# Altium PCB PCB1.PcbDoc
Units mil, origin at the board's own origin, x right, y up, seen from the top; angles counter-clockwise.
Board outline 2755.91 x 1968.5 mil, 2 copper layers (Top Layer, Bottom Layer); 43 components, 48 nets, 152 pads, 15 vias.
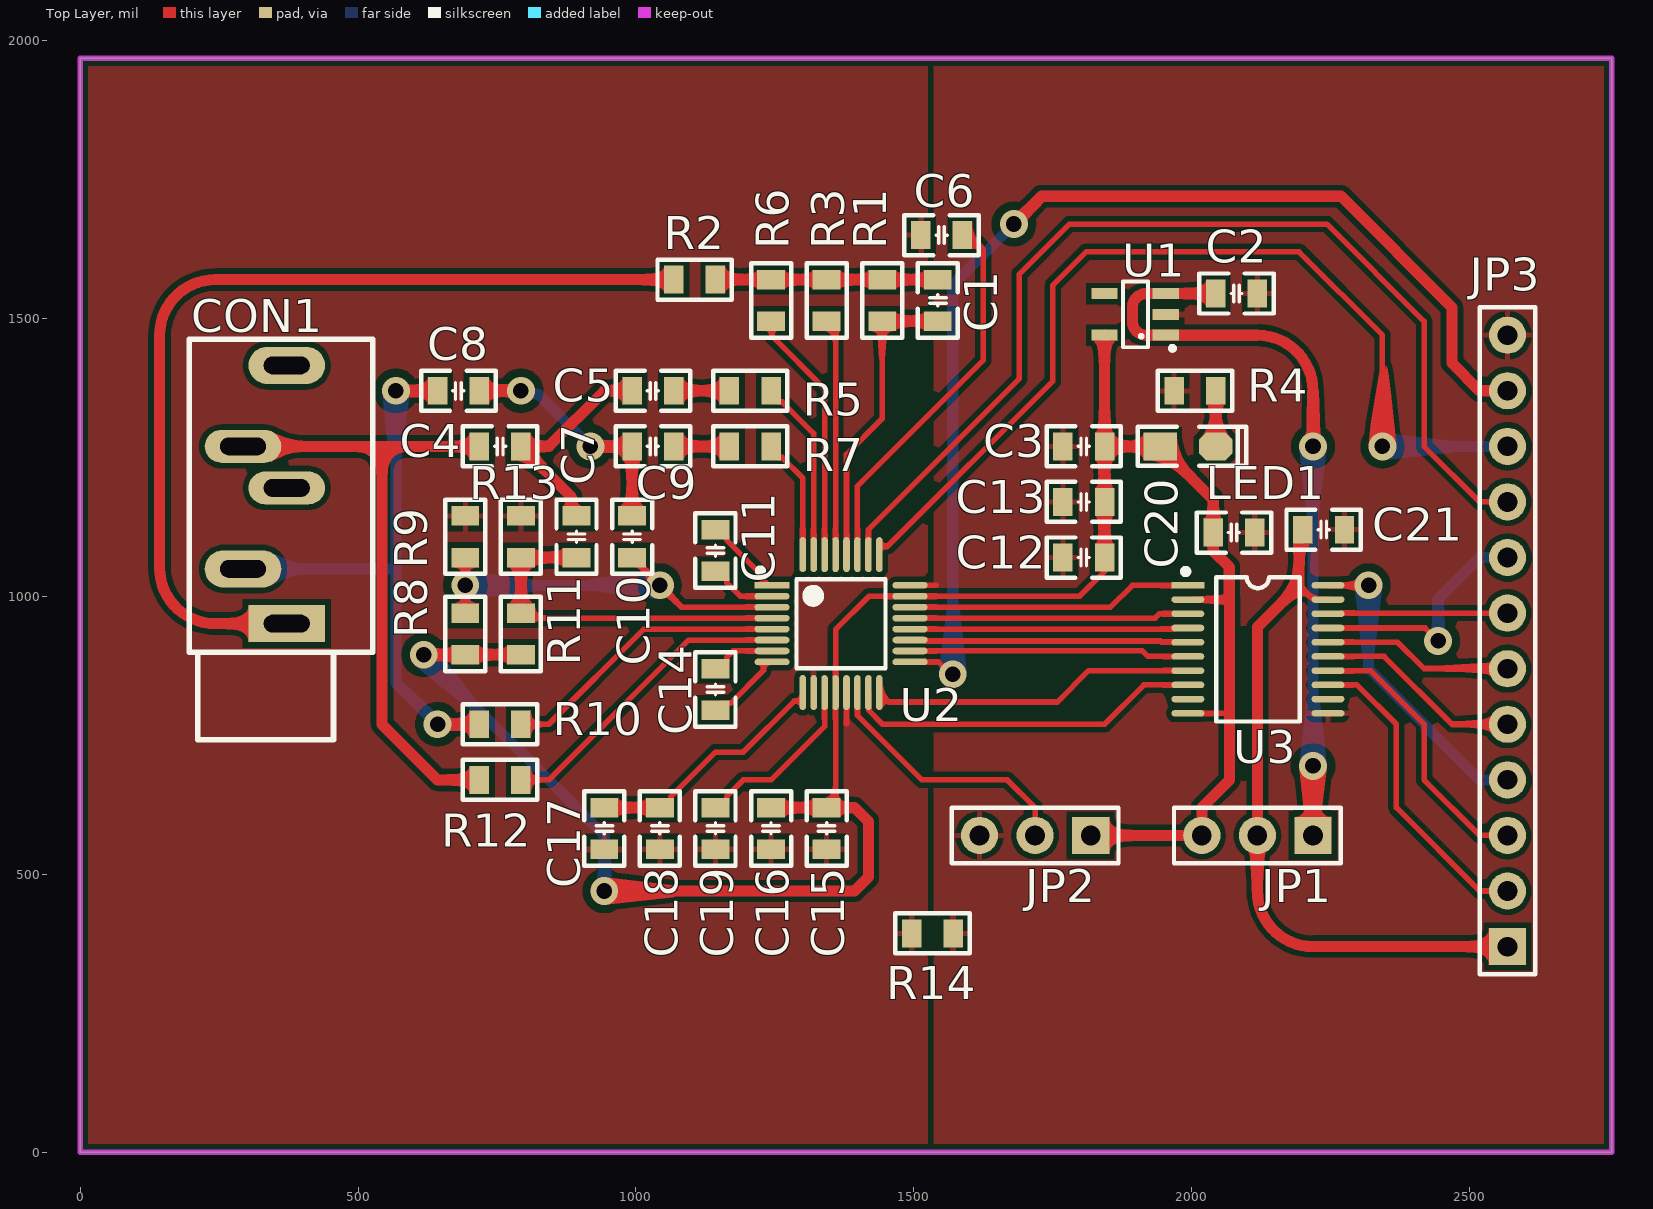
[diagram p0: Top Layer view]
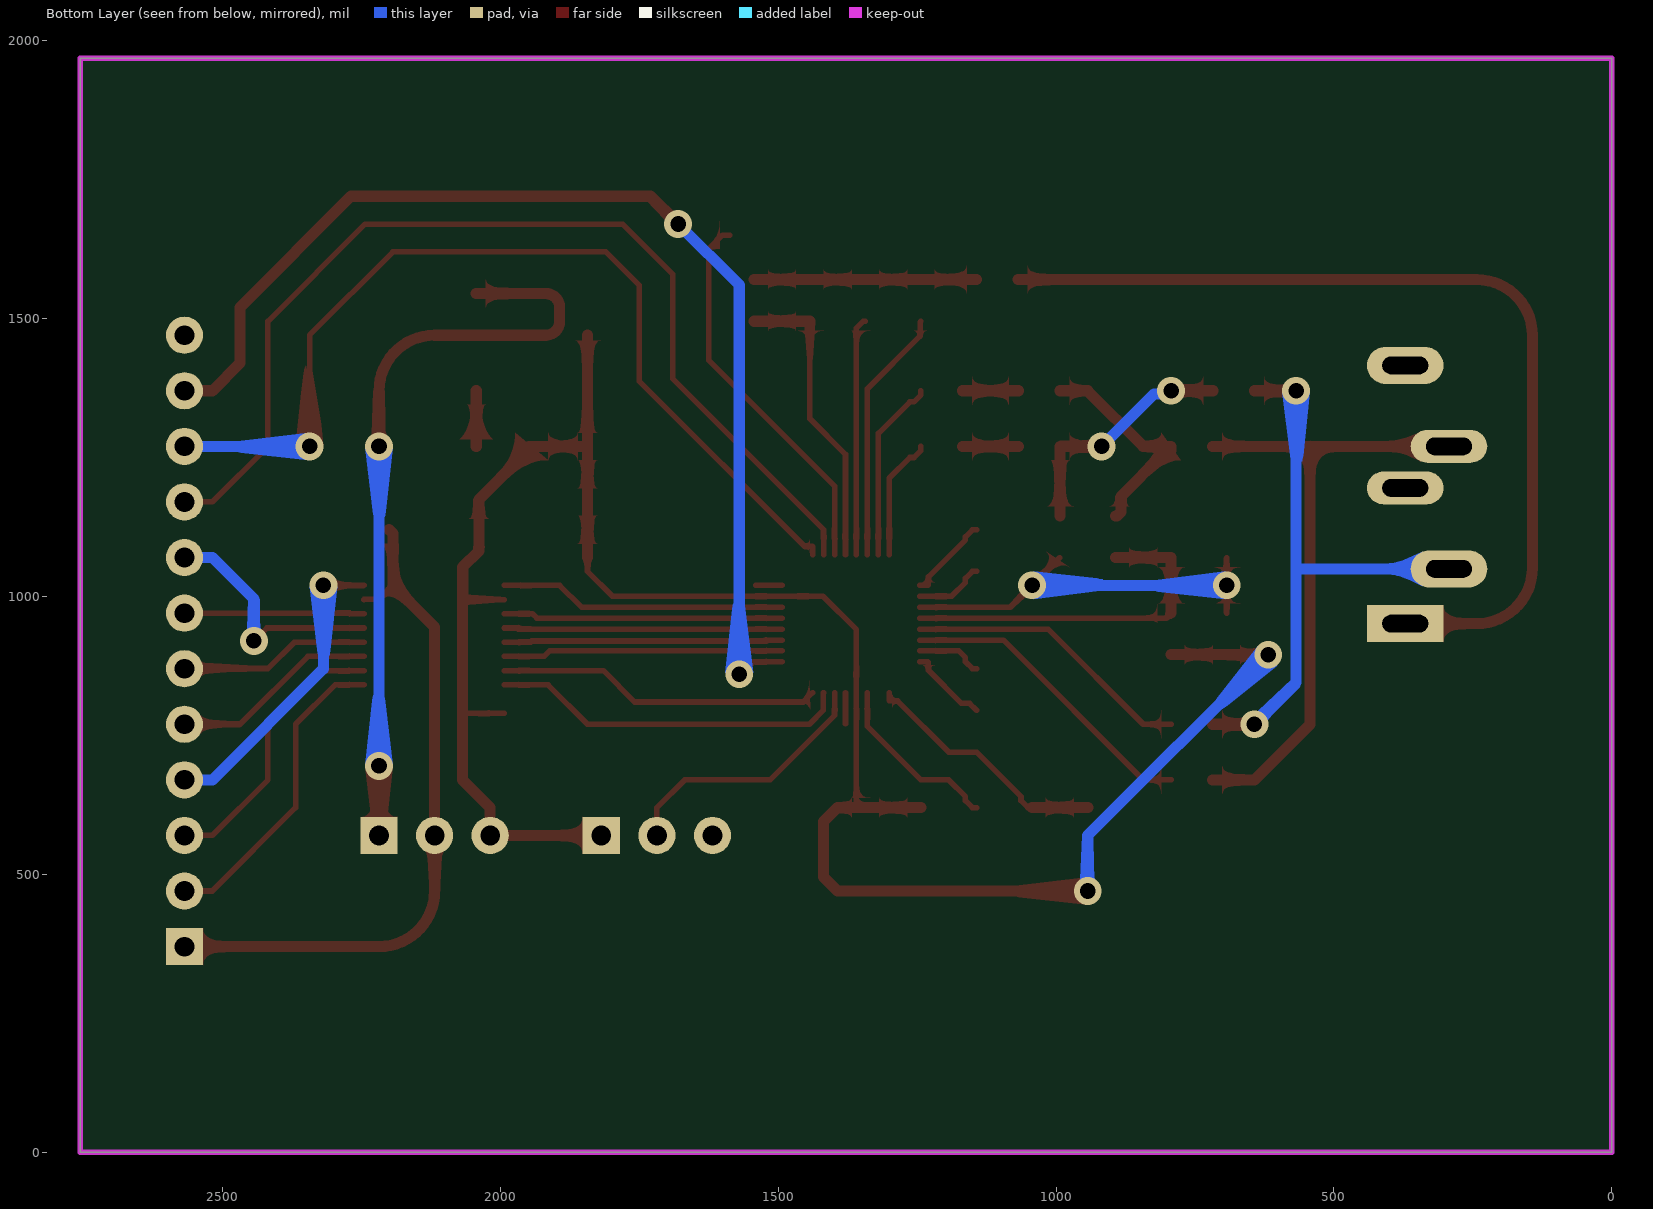
[diagram p1: Bottom Layer view, seen from below]

## Layer stack, top to bottom
Top Solder: solder mask 0.4, Solder Resist, Dk 3.5
Top Layer: signal copper 1.4
Dielectric 1: dielectric 12.6, FR-4, Dk 4.8
Bottom Layer: signal copper 1.4
Bottom Solder: solder mask 0.4, Solder Resist, Dk 3.5

## Board outline
0,0 0,1968.5 2755.91,1968.5 2755.91,0

## Design rules (kind name [scope] priority, off if disabled: settings)
Clearance [All] p1: gap=10 ignorepadtopadclearanceinfootprint=TRUE except(0: Arc-Hole Track-Hole SMDPad-Hole THPad-Hole Via-Hole Fill-Hole Poly-Hole Region-Hole Text-Hole; 4: SMDPad-Region; 7: Arc-Arc Arc-Track Arc-SMDPad Track-Track Track-SMDPad Track-Region Region-Region; 15: Via-Fill Via-Poly Via-Region)
PolygonConnect [All] p1: connectstyle=Relief reliefconductorwidth=10 reliefentries=4 polygonreliefangle="90 Angle" airgapwidth=10
RoutingVias [All] p1: holewidth=28 width=50 viastyle="Through Hole" minholewidth=28 minwidth=50 maxholewidth=28 maxwidth=50
SolderMaskExpansion [All] p1: expansion=4
Width [All] p1: maxlimit=20 minlimit=10 preferedwidth=10 minimp=50.000000 maximp=50.000000 favimp=50.000000
30 further rules are at their usual default settings.

## Components (designator, comment, footprint, x,y, rotation, side; value= is the part's Value field where it differs from the comment)
C1 "47p" "C 0805_L" 1543.11,1532.56 r270 top
C2 "1u" "C 0805_L" 2080.51,1544.96 r180 top
C3 "1u" "C 0805_L" 1805.71,1269.96 r0 top
C4 "100n" "C 0805_L" 755.71,1269.96 r0 top
C5 "2.2n" "C 0805_L" 1030.52,1369.96 r0 top
C6 "1u" "C 0805_L" 1550,1650 r180 top
C7 "2.2n" "C 0805_L" 893.11,1107.37 r90 top
C8 "100n" "C 0805_L" 680.51,1369.96 r0 top
C9 "2.2n" "C 0805_L" 1030.52,1269.96 r0 top
C10 "2.2n" "C 0805_L" 993.11,1107.37 r90 top
C11 "47n" "C 0805_L" 1143.11,1082.37 r90 top
C12 "100n" "C 0805_L" 1805.71,1069.96 r0 top
C13 "1u" "C 0805_L" 1805.71,1169.96 r180 top
C14 "47n" "C 0805_L" 1143.11,832.56 r90 top
C15 "1u" "C 0805_L" 1343.11,582.56 r90 top
C16 "100n" "C 0805_L" 1243.11,582.56 r90 top
C17 "10u" "C 0805_L" 943.11,582.56 r90 top
C18 "100n" "C 0805_L" 1043.11,582.56 r90 top
C19 "1u" "C 0805_L" 1143.11,582.56 r90 top
C20 "100n" "C 0805_L" 2075.9,1114.96 r180 top
C21 "100n" "C 0805_L" 2237.4,1120 r0 top
CON1 "PJ325_BK" PJ325_BK 371.85,951.06 r90 top
JP1 "HDR-1X3" HDR2.54-LI-3P 2118.11,569.96 r180 top
JP2 "HDR-1X3" HDR2.54-LI-3P 1718.11,569.96 r180 top
JP3 "HDR-1X12" HDR2.54-LI-12P 2568.11,919.96 r90 top
LED1 "绿色" "LED 0805G" 1993.11,1269.96 r0 top
R1 "1M" "R 0805_L" 1443.11,1532.56 r270 top
R2 "100k" "R 0805_L" 1105.71,1569.96 r0 top
R3 "100k" "R 0805_L" 1343.11,1532.56 r270 top
R4 "330R" "R 0805_L" 2005.71,1369.96 r0 top
R5 "40.2k" "R 0805_L" 1205.71,1369.96 r0 top
R6 "0R" "R 0805_L" 1243.11,1532.56 r270 top
R7 "40.2k" "R 0805_L" 1205.71,1269.96 r0 top
R8 "10M" "R 0805_L" 693.11,932.56 r270 top
R9 "10M" "R 0805_L" 693.11,1107.37 r90 top
R10 "0R" "R 0805_L" 755.71,769.96 r0 top
R11 "10M" "R 0805_L" 793.11,932.56 r270 top
R12 "0R" "R 0805_L" 755.71,669.96 r0 top
R13 "10M" "R 0805_L" 793.11,1107.37 r90 top
R14 "0R" "R 0805_L" 1533.47,393.7 r0 top
U1 "REG102NA-3.3" REG102NA-3.3 1898.23,1507.36 r180 top
U2 "ADS1292R" ADS1292R 1369,951.06 r0 top
U3 "TXS0108EPWR" TXS0108EPWR 2119.09,904.8 r0 top

## Footprints (in the part's own frame and the unit in brackets; to place one, negate y for a bottom-side part, rotate by r counter-clockwise, add the part's x,y. Pads: shape width x height; smd on the part's side, far side on the other; paste and mask are expansions set on the pad)
ADS1292R [mm]
  rect 1.6x0.3 smd: 1(-3.152,1.75)
  oval 1.6x0.3 smd: 2(-3.152,1.25) 3(-3.152,0.75) 4(-3.152,0.25) 5(-3.152,-0.25) 6(-3.152,-0.75) 7(-3.152,-1.25) 8(-3.152,-1.75) 17(3.152,-1.75) 18(3.152,-1.25) 19(3.152,-0.75) 20(3.152,-0.25) 21(3.152,0.25) 22(3.152,0.75) 23(3.152,1.25) 24(3.152,1.75)
  oval 0.3x1.6 smd: 9(-1.75,-3.152) 10(-1.25,-3.152) 11(-0.75,-3.152) 12(-0.25,-3.152) 13(0.25,-3.152) 14(0.75,-3.152) 15(1.25,-3.152) 16(1.75,-3.152) 25(1.75,3.152) 26(1.25,3.152) 27(0.75,3.152) 28(0.25,3.152) 29(-0.25,3.152) 30(-0.75,3.152) 31(-1.25,3.152) 32(-1.75,3.152)
  silkscreen extent -3.81,-2.03 2.03,2.54, body extent -3.5,-3.5 3.5,3.5, height 1.05
"C 0805_L" [mil] "无极性贴片电容"
  rect 35x50 smd: 1(-37.4,0) 2(37.4,0)
  silkscreen extent -67,-36 67,36, body extent -39,-24 39,24, height 20
HDR2.54-LI-3P [mm] "排针，3脚"
  rect 1.7x1.7 hole 0.9: 1(-2.54,0)
  round 1.7 hole 0.9: 2(0,0) 3(2.54,0)
  silkscreen extent -3.81,-1.27 3.81,1.27, body extent -3.81,-1.27 3.81,1.27, height 8.5
HDR2.54-LI-12P [mm] "排针，13脚"
  rect 1.7x1.7 hole 0.9: 1(-13.97,0)
  round 1.7 hole 0.9: 2(-11.43,0) 3(-8.89,0) 4(-6.35,0) 5(-3.81,0) 6(-1.27,0) 7(1.27,0) 8(3.81,0) 9(6.35,0) 10(8.89,0) 11(11.43,0) 12(13.97,0)
  silkscreen extent -15.24,-1.27 15.24,1.27, body extent -15.24,-1.27 15.24,1.27, height 8.5
"LED 0805G" [mil] "绿色0805LED"
  rect 60x50 smd: 1(-50,0)
  oct 60x50 smd: 2(50,0)
  silkscreen extent -90,-35 105,35, body extent -39,-25 39,25, height 32
PJ325_BK [mm] "黑色，18*8.1*12.3mm"
  rect 1.7x3.5 hole 0.8 slot 2.1 at 90 deg: 1(0,0)
  oval 1.5x3.5 hole 0.8 slot 2.1 at 90 deg: 2(6.2,0) 3(8.1,2)
  oval 1.7x3.5 hole 0.8 slot 2.1 at 90 deg: 4(11.8,0) 5(2.5,2)
  silkscreen extent -5.3,-3.94 13,4.46, body extent -5.23,-3.9 12.8,4.2, height 12.35
"R 0805_L" [mil] "1/8W贴片电阻"
  rect 35x50 smd: 1(-37.4,0) 2(37.4,0)
  silkscreen extent -67,-36 67,36, body extent -39,-25 39,25, height 20
REG102NA-3.3 [mm]
  rect 1.2x0.5 smd: 1(-1.4,0.95) 2(-1.4,0) 3(-1.4,-0.95) 4(1.4,-0.95) 5(1.4,0.95)
  silkscreen extent -1.78,-1.5 0.56,1.63, body extent -1.4,-1.5 1.4,1.5, height 1.15
TXS0108EPWR [mm]
  rect 1.5x0.3 smd: 1(-3.2,2.925)
  oval 1.5x0.3 smd: 2(-3.2,2.275) 3(-3.2,1.625) 4(-3.2,0.975) 5(-3.2,0.325) 6(-3.2,-0.325) 7(-3.2,-0.975) 8(-3.2,-1.625) 9(-3.2,-2.275) 10(-3.2,-2.925) 11(3.2,-2.925) 12(3.2,-2.275) 13(3.2,-1.625) 14(3.2,-0.975) 15(3.2,-0.325) 16(3.2,0.325) 17(3.2,0.975) 18(3.2,1.625) 19(3.2,2.275) 20(3.2,2.925)
  silkscreen extent -3.43,-3.3 1.91,3.69, body extent -3.2,-3.25 3.2,3.25, height 1.03

## Part data
C1 C2 C3 C4 C5 C6 C7 C8 C9 C10 C11 C12 C13 C14 C15 C16 C17 C18 C19 C20 C21: library part C, "无极性贴片电容"
CON1: library part PJ325, "3.5mm耳机插座", BOM名称=¶ú», 学习资源=www.ooocke.
JP1 JP2: library part "Header 3", "3P接插件", BOM名称=3P接, 学习资源=www.ooocke.
JP3: library part "Header 12", "12P接插件", BOM名称=12P接, 学习资源=www.ooocke.
LED1: library part LED-SMD, "贴片LED", BOM名称=贴片, 学习资源=www.ooocke.
R1 R2 R3 R4 R5 R6 R7 R8 R9 R10 R11 R12 R13 R14: library part R, "贴片电阻"

## Via types
v1: diameter 50, hole 28, Top Layer to Bottom Layer, 15 vias

## Nets (pads, with @x,y where several pads share a name; then routed paths per layer and width w, separated by ;. In a path a pad name is that pad's centre, name@x,y a point inside that pad or via, vN(x,y) a via of type N, cw(c..) or ccw(c..) an arc to the next point about the centre after c; other vN are vias at no path point)
+3V3: C3.2 C12.2 C13.1 C15.2 C16.2 C20.2 JP1.3 JP2.1 LED1.1 R8.2 R11.2 U1.5 U2.12 U2.23 U3.2 U3.10 | length 4011.4
  Top Layer w10: C15.2@1346.66,619.96 1359.16,632.46 U2.12 1359.16,940.15 1419.28,1000.28 U2.23 1798.43,1000.28 1843.11,1044.96 C12.2 ; U3.10 2062.8,789.65 2068.11,794.96 ; U3.2 2067.52,994.37 2068.11,994.96
  Top Layer w20: v1(618.11,894.96) 618.31,895.16 R8.2 R11.2 ; v1(943.11,469.96) 1393.11,469.96 1418.11,494.96 1418.11,594.96 1393.11,619.96 1346.66,619.96 C15.2 C16.2 ; JP2.1 JP1.3 2018.11,619.96 2068.11,669.96 2068.11,794.96 2068.11,994.96 ; C12.2 C13.1 C3.2 ; U1.5 C3.2 ; 2067.52,994.37 2067.52,1052.48 2038.5,1081.5 C20.2 2038.5,1174.57 1963.11,1249.96 1963.11,1254.96 1948.11,1269.96 LED1.1 C3.2
  Bottom Layer w20: v1(618.11,894.96) 943.11,569.96 v1(943.11,469.96)
+5V: C2.2 JP1.1 U1.1 U1.3 | length 1385.7
  Top Layer w20: C2.2 1953.35,1544.96 U1.3 1917.91,1544.76 ccw(c1917.91,1519.96) 1893.11,1519.96 1893.11,1494.96 ccw(c1918.11,1494.96) 1918.11,1469.96 U1.1 2118.11,1469.96 cw(c2118.11,1369.96) 2218.11,1369.96 v1(2218.11,1269.96) ; JP1.1 v1(2218.11,694.96)
  Bottom Layer w20: v1(2218.11,694.96) v1(2218.11,1269.96)
ADS_PWDN: U2.15 U3.8 | length 646.2
  Top Layer w10: U2.15 1418.56,826.61 1418.56,795.38 1443.98,769.96 1843.11,769.96 1913.98,840.83 U3.8
ADS_START: U2.16 U3.7 | length 585.6
  Top Layer w10: U2.16 1454.85,810 1758.15,810 1814.57,866.42 U3.7
AGND: C6.2 C15.1 C16.1 C17.1 C18.1 C19.1 R9.2 R13.2 R14.1 U2.10 U2.13 | length 55.8
  Top Layer w10: 1378.84,771.16 U2.13
ARD_CS0: JP3.5 U3.15 | length 373.6
  Top Layer w10: U3.15 2346.06,892.01 2468.11,769.96 JP3.5
ARD_DRDY: JP3.4 U3.20 | length 555.9
  Top Layer w10: U3.20 v1(2318.11,1019.96)
  Bottom Layer w20: v1(2318.11,1019.96) 2318.11,869.96 2518.11,669.96 JP3.4
ARD_MISO: JP3.7 U3.18 | length 323.5
  Top Layer w10: U3.18 2269.19,968.78 2270.37,969.96 JP3.7
ARD_MOSI: JP3.6 U3.16 | length 342.8
  Top Layer w10: U3.16 2370.47,917.6 2418.11,869.96 JP3.6
ARD_PWDN: JP3.2 U3.13 | length 564.5
  Top Layer w10: U3.13 2297.24,840.83 2368.11,769.96 2368.11,619.96 2518.11,469.96 JP3.2
ARD_SCK: JP3.8 U3.17 | length 438.7
  Top Layer w10: U3.17 2419.88,943.19 v1(2443.11,919.96)
  Bottom Layer w20: v1(2443.11,919.96) 2443.11,994.96 2518.11,1069.96 JP3.8
ARD_START: JP3.3 U3.14 | length 504.4
  Top Layer w10: U3.14 2245.43,866.07 2322,866.07 2418.11,769.96 2418.11,669.96 2518.11,569.96 JP3.3
CLK: JP3.11 U2.17 | length 2054
  Top Layer w10: U2.17 1544.14,882.17 1566.31,860 v1(1570,860)
  Top Layer w20: v1(1680,1670) 1729.96,1719.96 2268.11,1719.96 2468.11,1519.96 2468.11,1419.96 2518.11,1369.96 JP3.11
  Bottom Layer w20: v1(1570,860) 1570,1560 v1(1680,1670)
DGND: C2.1 C3.1 C12.1 C13.2 C20.1 C21.2 JP2.3 JP3.12 R4.1 R14.2 U1.2 U2.24 U3.11 | length 46.9
  Top Layer w10: U2.24 1539.96,1019.96
DRDY: U2.22 U3.1 | length 516.3
  Top Layer w10: U2.22 1853.74,980.59 1893.11,1019.96 U3.1
GPIO1: JP3.9 U2.26 | length 1871.7
  Top Layer w10: U2.26 1418.21,1120.06 1690,1391.85 1690,1580 1779.96,1669.96 2243.11,1669.96 2418.11,1494.96 2418.11,1269.96 2518.11,1169.96 JP3.9
GPIO2: JP3.10 U2.25 | length 1727.5
  Top Layer w10: U2.25 1437.9,1089.38 1438.73,1090.22 1452.95,1090.22 1750,1387.28 1750,1560 1809.96,1619.96 2193.11,1619.96 2343.11,1469.96 v1(2343.11,1269.96)
  Bottom Layer w20: v1(2343.11,1269.96) JP3.10
NetC1_1: C1.1 R1.1 R2.2 R3.1 R6.1 | length 400
  Top Layer w20: R2.2 R6.1 R3.1 R1.1 C1.1
NetC1_2: C1.2 R1.2 U2.28 | length 546.6
  Top Layer w10: U2.28 1378.84,1255.69 1443.11,1319.96 R1.2
  Top Layer w20: R1.2 C1.2
NetC4_1: C4.1 CON1.3 R12.1 | length 1141.8
  Top Layer w20: CON1.3 543.11,1269.96 ; R12.1 643.11,669.96 543.11,769.96 543.11,1269.96 ; C4.1 543.11,1269.96
NetC4_2: C4.2 C5.1 C7.2 | length 413.8
  Top Layer w20: C7.2 890.75,1144.76 883.25,1152.26 883.25,1179.83 808.11,1254.96 800.61,1254.96 793.11,1262.46 C4.2 843.11,1269.96 943.11,1369.96 C5.1
NetC5_2: C5.2 R5.1 | length 100.4
  Top Layer w20: C5.2 R5.1
NetC6_1: C6.1 U2.27 | length 691.6
  Top Layer w10: U2.27 1398.53,1198.53 1625,1425 1625,1625 1600,1650 C6.1
NetC7_1: C7.1 R11.1 R13.1 U2.4 | length 655.5
  Top Layer w10: R11.1 802.17,960.91 U2.4
  Top Layer w20: R11.1 R13.1 C7.1
NetC8_1: C8.1 CON1.5 R10.1 | length 1058.1
  Top Layer w20: v1(568.11,1369.96) C8.1 ; v1(643.11,769.96) R10.1
  Bottom Layer w20: CON1.5 563.58,1049.49 568.11,1044.96 ; v1(568.11,1369.96) 568.11,1044.96 ; v1(643.11,769.96) 568.11,844.96 568.11,1044.96
NetC8_2: C8.2 C9.1 C10.2 | length 441.8
  Top Layer w20: C8.2 v1(793.11,1369.96) ; v1(918.11,1269.96) C9.1 C10.2
  Bottom Layer w20: v1(793.11,1369.96) 798.85,1364.22 823.85,1364.22 v1(918.11,1269.96)
NetC9_2: C9.2 R7.1 | length 100.4
  Top Layer w20: C9.2 R7.1
NetC10_1: C10.1 R8.1 R9.1 U2.3 | length 738.8
  Top Layer w10: R8.1 v1(693.11,1019.96) R9.1 ; C10.1 v1(1043.11,1019.96) 1082.48,980.59 U2.3
  Bottom Layer w20: v1(693.11,1019.96) v1(1043.11,1019.96)
NetC11_1: C11.1 U2.2 | length 124.7
  Top Layer w10: C11.1 1150.61,1044.96 1163.11,1032.46 1163.11,1024.96 1187.8,1000.28 U2.2
NetC11_2: C11.2 U2.1 | length 154.6
  Top Layer w10: C11.2 1150.61,1119.76 1163.11,1107.26 1163.11,1101.74 1229.84,1035.01 1229.84,1020.87 1230.75,1019.96 U2.1
NetC14_1: C14.1 U2.8 | length 146.1
  Top Layer w10: C14.1 1155.61,807.66 1170.38,807.66 1229.84,867.12 1229.84,881.33 1230.68,882.17 U2.8
NetC14_2: C14.2 U2.7 | length 119.4
  Top Layer w10: C14.2 1150.61,869.96 1163.11,882.46 1163.11,889.96 1175,901.85 U2.7
NetC17_2: C17.2 C18.2 U2.9 | length 455.4
  Top Layer w10: C18.2 1050.61,619.96 1063.11,632.46 1063.11,639.96 1143.11,719.96 1193.11,719.96 1285.05,811.91 1299.27,811.91 1300.1,812.74 U2.9
  Top Layer w20: C17.2 C18.2
NetC19_2: C19.2 U2.11 | length 322
  Top Layer w10: C19.2 1150.61,619.96 1163.11,632.46 1163.11,639.96 1193.11,669.96 1243.11,669.96 1339.47,766.32 U2.11
NetCON1_1: CON1.1 R2.1 | length 1687
  Top Layer w20: CON1.1 243.11,951.06 cw(c243.11,1051.06) 143.11,1051.06 143.11,1469.96 cw(c243.11,1469.96) 243.11,1569.96 R2.1
NetJP2_2: JP2.2 U2.14 | length 479.3
  Top Layer w10: U2.14 1398.53,785.94 1514.51,669.96 1668.11,669.96 1718.11,619.96 JP2.2
NetLED1_2: LED1.2 R4.2 | length 100
  Top Layer w20: LED1.2 R4.2
NetR3_2: R3.2 U2.29 | length 428.7
  Top Layer w10: R3.2 1346.66,1495.16 1359.16,1482.66 U2.29
NetR5_2: R5.2 U2.31 | length 330.9
  Top Layer w10: R5.2 1243.11,1362.46 1255.61,1349.96 1263.11,1349.96 1319.79,1293.28 U2.31
NetR6_2: R6.2 U2.30 | length 459.9
  Top Layer w10: R6.2 1244.56,1493.71 1244.56,1468.52 1339.47,1373.6 U2.30
NetR7_2: R7.2 U2.32 | length 222.8
  Top Layer w10: R7.2 1243.11,1262.46 1255.61,1249.96 1263.11,1249.96 1300.1,1212.97 U2.32
NetR10_2: R10.2 U2.5 | length 522.7
  Top Layer w10: R10.2 843.11,769.96 1014.37,941.22 U2.5
NetR12_2: R12.2 U2.6 | length 556
  Top Layer w10: R12.2 843.11,669.96 1094.68,921.54 U2.6
SPI_CS0: U2.18 U3.6 | length 504.1
  Top Layer w10: U2.18 1911.22,901.85 1921.06,892.01 U3.6
SPI_MISO: U2.21 U3.3 | length 503.3
  Top Layer w10: U2.21 1934.06,960.91 1941.93,968.78 U3.3
SPI_MOSI: U2.19 U3.5 | length 501.6
  Top Layer w10: U2.19 1519.19,921.54 1520.97,919.76 1943.11,919.76 1945.27,917.6 U3.5
SPI_SCK: U2.20 U3.4 | length 500.8
  Top Layer w10: U2.20 1967.03,941.22 1969,943.19 U3.4
VCC: C21.1 JP1.2 JP3.1 U3.19 | length 1253.6
  Top Layer w10: 2193.11,1019.96 2218.35,994.72 2244.73,994.72 U3.19
  Top Layer w20: C21.1 2193.11,1113.11 2193.11,1019.96 2118.11,944.96 JP1.2 2118.11,469.96 ccw(c2218.11,469.96) 2218.11,369.96 JP3.1
pads on no net: CON1.2 CON1.4 U1.4 U3.9 U3.12

## Polygon pours and split planes (outlines as drawn)
no net on Bottom Layer "Bottom Layer-No Net" (solid, pour order 2): 2800,2000
no net on Bottom Layer "Bottom Layer-No Net 1" (solid, pour order 0): 2755.91,1968.5
AGND on Top Layer "AGND_L01_P008" (solid, remove dead copper, pour order 8): 0,1968.5 1535.43,1968.5 1535.43,0 0,0
DGND on Top Layer "DGND_L01_P006" (solid, remove dead copper, pour order 6): 1535.43,1968.5 2755.91,1968.5 2755.91,0 1535.43,0

## Keep-outs
Keep-Out Layer:
  the board outline again, w10